# EAGLE board UmnitsaRGB (EAGLE 9.3.0)
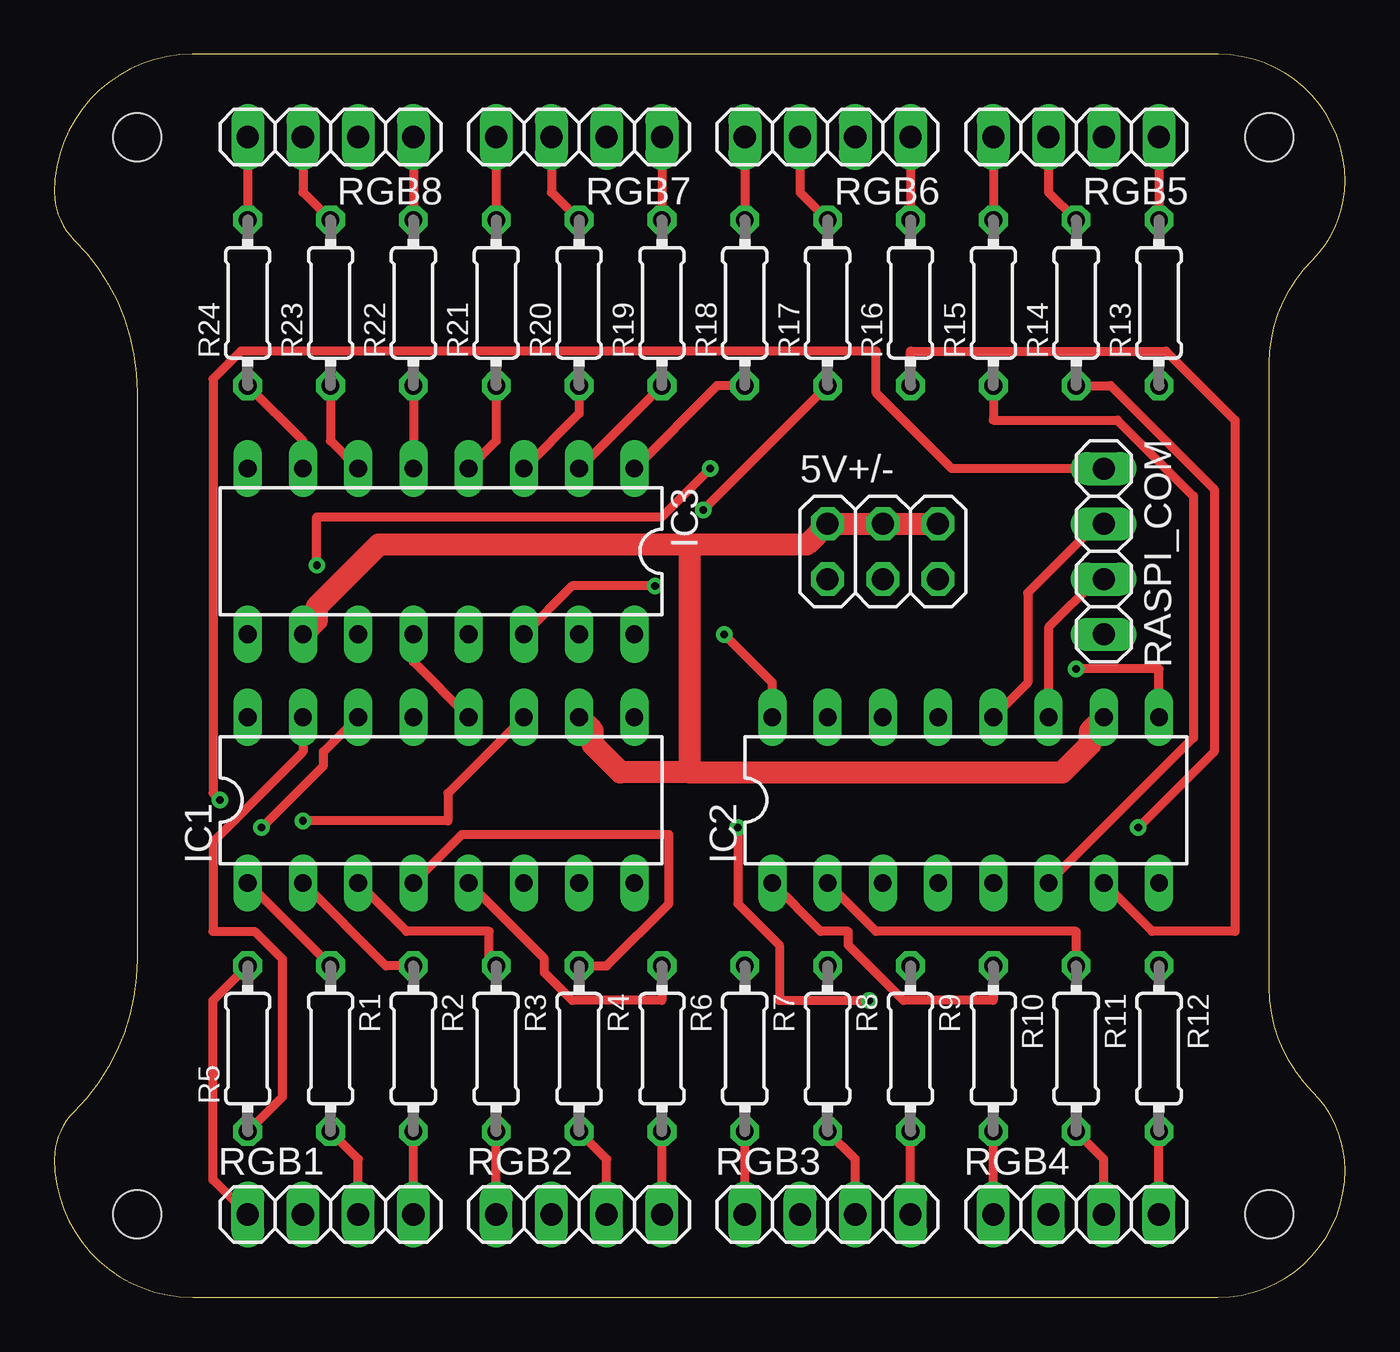
[diagram p0: board, top side]
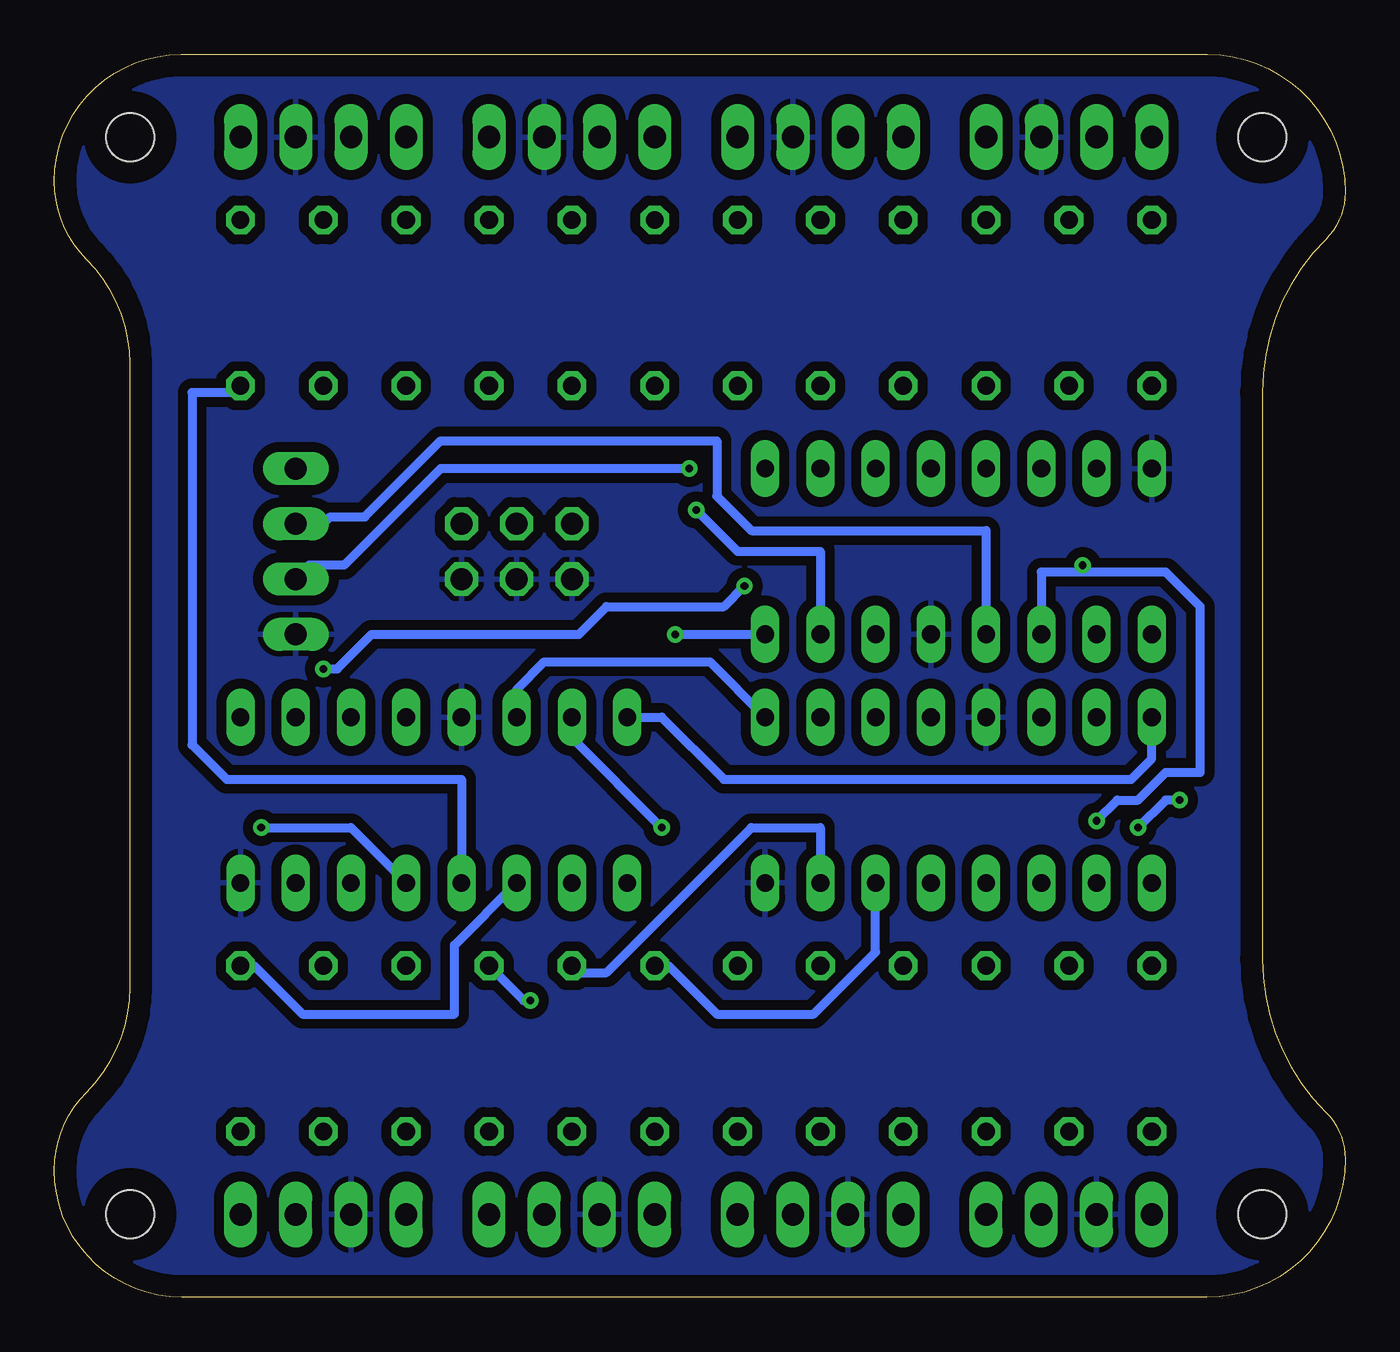
[diagram p1: board, bottom side, seen from below]

Size 59.36 x 57.14 mm. Coordinates in mm from the lower left corner, seen from the top.
Outline: 0.9,48.63 arc-45 3.81,41.61 3.81,15.55 arc-45 0.9,8.52 arc45 0,6.35 arc90 6.35,0 53.51,0 arc90 59.36,5.85 arc45 57.88,9.43 arc-45 55.88,14.25 55.88,42.91 arc-45 57.87,47.71 arc45 59.36,51.31 arc90 53.53,57.14 6.33,57.14 arc90 0,50.8 arc45 0.9,48.63
Copper layers (1*16): Top 0.035mm / dielectric 1.5mm / Bottom 0.035mm
Design rules "default": minimum track width 6mil, minimum drill 0.35mm, track to track 6mil, track to pad 6mil, pad to pad 6mil, via to via 6mil, smd to smd 6mil, copper to edge 40mil, drill to drill 6mil, minimum pad ring 10mil, minimum via ring 8mil, stop-mask expansion 4mil, vias tented up to drill 0mil, thermal gap 10mil
Net classes: 0 default: width 0.406 mm, clearance 0.457 mm; 1 Power: width 1.016 mm, clearance 0.457 mm
Holes 2.2 mm at 3.81,3.81 55.88,3.81 55.88,53.34 3.81,53.34

## Footprints (pad centres in the part's own frame; a part is rotated, then mirrored left to right if it is on the bottom)
2X03 = drill 1.016 octagon: 1 -2.54,-1.27; 2 -2.54,1.27; 3 0,-1.27; 4 0,1.27; 5 2.54,-1.27; 6 2.54,1.27
DIL16 = drill 0.813 long: 1 -8.89,-3.81; 2 -6.35,-3.81; 3 -3.81,-3.81; 4 -1.27,-3.81; 5 1.27,-3.81; 6 3.81,-3.81; 7 6.35,-3.81; 8 8.89,-3.81; 9 8.89,3.81; 10 6.35,3.81; 11 3.81,3.81; 12 1.27,3.81; 13 -1.27,3.81; 14 -3.81,3.81; 15 -6.35,3.81; 16 -8.89,3.81
0204/7 = drill 0.813 octagon: 1 -3.81,0; 2 3.81,0
1X04 = drill 1.016 long: 1 -3.81,0; 2 -1.27,0; 3 1.27,0; 4 3.81,0

## Placement (x,y rotation side)
5V+/-  [2X03]  38.1,34.29 0 top
IC1  74LS595N  [DIL16]  17.78,22.86 0 top
IC2  74LS595N  [DIL16]  41.91,22.86 0 top
IC3  74LS595N  [DIL16]  17.78,34.29 180 top
R1  [0204/7]  12.7,11.43 270 top
R2  [0204/7]  16.51,11.43 270 top
R3  [0204/7]  20.32,11.43 270 top
R4  [0204/7]  24.13,11.43 270 top
R5  [0204/7]  8.89,11.43 90 top
R6  [0204/7]  27.94,11.43 270 top
R7  [0204/7]  31.75,11.43 270 top
R8  [0204/7]  35.56,11.43 270 top
R9  [0204/7]  39.37,11.43 270 top
R10  [0204/7]  43.18,11.43 270 top
R11  [0204/7]  46.99,11.43 270 top
R12  [0204/7]  50.8,11.43 270 top
R13  [0204/7]  50.8,45.72 90 top
R14  [0204/7]  46.99,45.72 90 top
R15  [0204/7]  43.18,45.72 90 top
R16  [0204/7]  39.37,45.72 90 top
R17  [0204/7]  35.56,45.72 90 top
R18  [0204/7]  31.75,45.72 90 top
R19  [0204/7]  27.94,45.72 90 top
R20  [0204/7]  24.13,45.72 90 top
R21  [0204/7]  20.32,45.72 90 top
R22  [0204/7]  16.51,45.72 90 top
R23  [0204/7]  12.7,45.72 90 top
R24  [0204/7]  8.89,45.72 90 top
RASPI_COM  [1X04]  48.26,34.29 270 top
RGB1  [1X04]  12.7,3.81 0 top
RGB2  [1X04]  24.13,3.81 0 top
RGB3  [1X04]  35.56,3.81 0 top
RGB4  [1X04]  46.99,3.81 0 top
RGB5  [1X04]  46.99,53.34 180 top
RGB6  [1X04]  35.56,53.34 180 top
RGB7  [1X04]  24.13,53.34 180 top
RGB8  [1X04]  12.7,53.34 180 top

## Library data of the parts
5V+/- RASPI_COM RGB1-RGB8 = pinhead
IC1-IC3 = 74xx-us
R1-R24 = resistor

## Nets
GND [Power]: 5V+/-.1 5V+/-.3 5V+/-.5 IC1.8 IC1.13 IC2.8 IC2.13 IC3.8 IC3.13 RASPI_COM.4 RGB1.2 RGB2.2 RGB3.2 RGB4.2 RGB5.2 RGB6.2 RGB7.2 RGB8.2
N$1: R5.2 RGB1.1
N$2: R1.2 RGB1.3
N$3: R2.2 RGB1.4
N$4: R3.2 RGB2.1
N$5: R4.2 RGB2.3
N$6: R6.2 RGB2.4
N$7: R7.2 RGB3.1
N$8: R8.2 RGB3.3
N$9: R9.2 RGB3.4
N$10: R10.2 RGB4.1
N$11: R11.2 RGB4.3
N$12: R12.2 RGB4.4
N$13: R13.2 RGB5.1
N$14: R14.2 RGB5.3
N$15: R15.2 RGB5.4
N$16: R16.2 RGB6.1
N$17: R17.2 RGB6.3
N$18: R18.2 RGB6.4
N$19: IC1.14 RASPI_COM.1
N$20: IC1.12 IC2.12 IC3.12 RASPI_COM.2
N$21: IC1.9 IC2.14
N$22: IC2.9 IC3.14
N$23: IC1.11 IC2.11 IC3.11 RASPI_COM.3
N$24: IC1.15 R5.1
N$25: IC1.1 R1.1
N$26: IC1.2 R2.1
N$27: IC1.3 R3.1
N$28: IC1.4 R4.1
N$29: IC1.5 R6.1
N$30: IC1.6 R7.1
N$31: IC2.1 R10.1
N$32: IC2.15 R9.1
N$33: IC1.7 R8.1
N$34: IC2.2 R11.1
N$35: IC2.3 R12.1
N$36: IC2.4 R13.1
N$37: IC2.5 R14.1
N$38: IC2.6 R15.1
N$39: IC2.7 R16.1
N$40: IC3.15 R17.1
N$41: IC3.1 R18.1
N$42: IC3.2 R19.1
N$43: IC3.3 R20.1
N$44: IC3.4 R21.1
N$45: IC3.5 R22.1
N$46: IC3.6 R23.1
N$47: IC3.7 R24.1
N$48: R19.2 RGB7.1
N$49: R20.2 RGB7.3
N$50: R21.2 RGB7.4
N$51: R22.2 RGB8.1
N$52: R23.2 RGB8.3
N$53: R24.2 RGB8.4
VCC: IC1.16 IC2.16 IC3.16
VCCIO [Power]: 5V+/-.2 5V+/-.4 5V+/-.6 IC1.10 IC2.10 IC3.10

## Tracks (layer width: path | path; a pad name or v marks a point on that pad's centre or on a via)
GND
  pour Bottom (isolate 0.457): 59.69,50.8 59.69,6.35 arc-90 53.34,0 6.35,0 arc-90 0,6.35 0,50.8 arc-90 6.35,57.15 53.34,57.15 arc-90
N$1
  Top 0.406: R5.2 7.3,13.65 7.3,5.4 RGB1.1
N$2
  Top 0.406: R1.2 13.97,6.35 RGB1.3
N$3
  Top 0.406: RGB1.4 R2.2
N$4
  Top 0.406: RGB2.1 R3.2
N$5
  Top 0.406: R4.2 25.4,6.35 RGB2.3
N$6
  Top 0.406: RGB2.4 R6.2
N$7
  Top 0.406: RGB3.1 R7.2
N$8
  Top 0.406: R8.2 36.83,6.35 RGB3.3
N$9
  Top 0.406: RGB3.4 R9.2
N$10
  Top 0.406: RGB4.1 R10.2
N$11
  Top 0.406: R11.2 48.26,6.35 RGB4.3
N$12
  Top 0.406: RGB4.4 R12.2
N$13
  Top 0.406: RGB5.1 R13.2
N$14
  Top 0.406: R14.2 45.72,50.8 RGB5.3
N$15
  Top 0.406: RGB5.4 R15.2
N$16
  Top 0.406: RGB6.1 R16.2
N$17
  Top 0.406: R17.2 34.29,50.8 RGB6.3
N$18
  Top 0.406: RGB6.4 R18.2
N$19  (via drill 0.35)
  Top 0.406: IC1.14 12.38,25.08 12.38,24.45 v9.53,21.59 | v7.62,22.86 7.3,23.18 7.3,42.23 8.57,43.5 37.78,43.5 37.78,41.59 41.27,38.1 RASPI_COM.1
  Bottom 0.406: v9.53,21.59 8.25,22.86 v7.62,22.86
N$20
  Top 0.406: IC1.12 16.51,29.21 IC3.12 | IC2.12 44.77,28.26 44.77,32.38 47.94,35.56 RASPI_COM.2
  Bottom 0.406: IC3.12 16.51,35.24 27.3,35.24 28.89,36.83 28.89,39.37 41.59,39.37 45.09,35.88 46.67,35.88 46.99,35.56 RASPI_COM.2
N$21
  Bottom 0.406: IC1.9 29.21,29.21 36.83,29.21 38.1,27.94 IC2.14
N$22  (via drill 0.35)
  Top 0.406: IC3.14 23.81,32.7 v27.62,32.7 | v46.99,28.89 50.8,28.89 IC2.9
  Bottom 0.406: v27.62,32.7 28.57,31.75 33.97,31.75 35.24,30.48 44.77,30.48 46.35,28.89 v46.99,28.89
N$23  (via drill 0.35)
  Top 0.406: IC2.11 45.72,30.8 47.94,33.02 RASPI_COM.3 | v11.43,21.91 18.1,21.91 18.1,23.18 IC1.11 | v30.16,38.1 27.94,35.88 12.07,35.88 v12.07,33.66
  Bottom 0.406: IC3.11 13.97,33.34 12.07,33.34 | 12.07,33.34 8.25,33.34 6.67,31.75 6.67,24.13 8.25,24.13 9.53,22.86 10.48,22.86 v11.43,21.91 | RASPI_COM.3 47.62,33.66 46.04,33.66 41.59,38.1 v30.16,38.1 | 12.07,33.34 v12.07,33.66
N$24
  Top 0.406: R5.1 10.48,9.21 10.48,15.56 9.21,16.83 7.3,16.83 7.3,20.95 11.43,25.08 IC1.15
N$25
  Top 0.406: R1.1 IC1.1
N$26
  Top 0.406: IC1.2 15.24,15.24 R2.1
N$27
  Top 0.406: IC1.3 16.19,16.83 20,16.83 20,15.56 R3.1
N$28
  Top 0.406: IC1.4 18.73,21.27 28.26,21.27 28.26,18.1 25.4,15.24 R4.1
N$29
  Top 0.406: IC1.5 22.54,15.56 22.54,14.92 23.81,13.65 27.94,13.65 R6.1
N$30
  Bottom 0.406: IC1.6 21.59,15.88 24.45,13.02 28.89,13.02 31.11,15.24 R7.1
N$31
  Top 0.406: IC2.1 35.24,16.83 36.51,16.83 36.51,16.19 39.05,13.65 43.18,13.65 R10.1
N$32  (via drill 0.35)
  Top 0.406: v37.46,13.65 33.34,13.65 33.34,16.19 31.43,18.1 v31.43,21.59
  Bottom 0.406: R9.1 37.78,13.65 v37.46,13.65 | v31.43,21.59 35.56,25.72 IC2.15
N$33
  Bottom 0.406: IC1.7 24.13,21.59 27.3,21.59 33.97,14.92 35.24,14.92 R8.1
N$34
  Top 0.406: IC2.2 37.78,16.83 46.99,16.83 R11.1
N$35
  Bottom 0.406: IC2.3 40.96,16.19 40.96,13.02 47.94,13.02 50.16,15.24 R12.1
N$36
  Bottom 0.406: IC2.4 40.64,23.81 51.44,23.81 53.02,25.4 53.02,41.59 51.12,41.59 R13.1
N$37  (via drill 0.35)
  Top 0.406: v49.85,21.59 53.34,25.08 53.34,37.15 48.58,41.91 R14.1
  Bottom 0.406: IC2.5 45.72,21.59 v49.85,21.59
N$38
  Top 0.406: IC2.6 52.39,25.72 52.39,36.83 48.89,40.32 43.18,40.32 R15.1
N$39
  Top 0.406: IC2.7 50.48,16.83 54.29,16.83 54.29,40.32 51.12,43.5 39.37,43.5 R16.1
N$40  (via drill 0.35)
  Top 0.406: R17.1 v29.84,36.2
  Bottom 0.406: IC3.15 24.13,34.29 27.94,34.29 v29.84,36.2
N$41
  Top 0.406: IC3.1 30.48,41.91 R18.1
N$42
  Top 0.406: R19.1 IC3.2
N$43
  Top 0.406: IC3.3 24.13,40.64 R20.1
N$44
  Top 0.406: IC3.4 20.32,39.37 R21.1
N$45
  Top 0.406: R22.1 IC3.5
N$46
  Top 0.406: IC3.6 12.7,39.37 R23.1
N$47
  Top 0.406: R24.1 11.43,39.37 IC3.7
N$48
  Top 0.406: RGB7.1 R19.2
N$49
  Top 0.406: R20.2 22.86,50.8 RGB7.3
N$50
  Top 0.406: RGB7.4 R21.2
N$51
  Top 0.406: RGB8.1 R22.2
N$52
  Top 0.406: R23.2 11.43,50.8 RGB8.3
N$53
  Top 0.406: RGB8.4 R24.2
VCC  (via drill 0.35)
  Top 0.406: v30.8,30.48 33.02,28.26 IC2.16
  Bottom 0.406: IC1.16 8.89,24.77 9.84,23.81 28.57,23.81 31.43,26.67 IC2.16 | v30.8,30.48 IC3.16
VCCIO
  Top 1.016: IC3.10 12.07,31.11 12.07,31.75 14.92,34.61 29.21,34.61 | 29.21,34.61 34.61,34.61 5V+/-.2 5V+/-.4 5V+/-.6 | IC1.10 24.77,26.04 24.77,25.4 26.04,24.13 29.21,24.13 | 29.21,34.61 29.21,24.13 | IC2.10 47.62,26.04 47.62,25.4 46.35,24.13 29.21,24.13